# EAGLE board xerc2-1- (EAGLE 7.5.0)
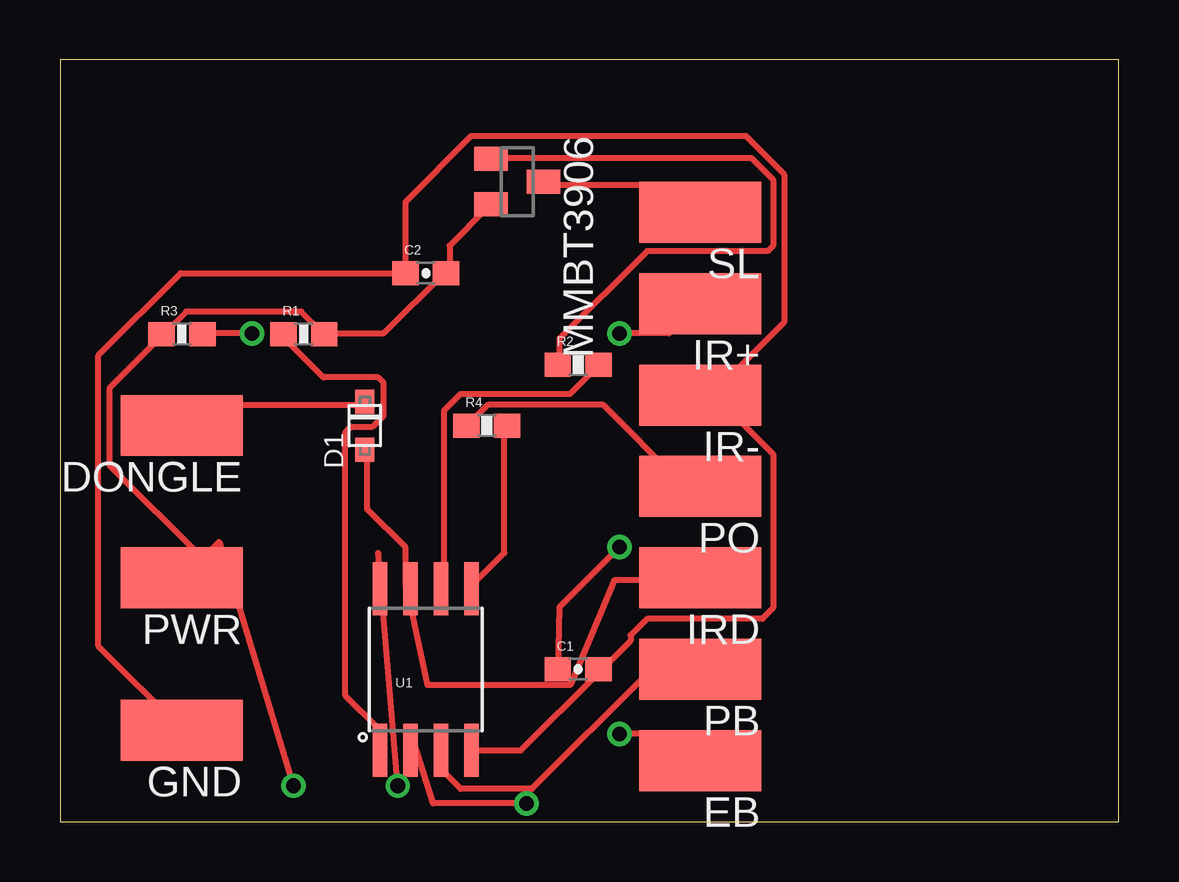
[diagram p0: board, top side]
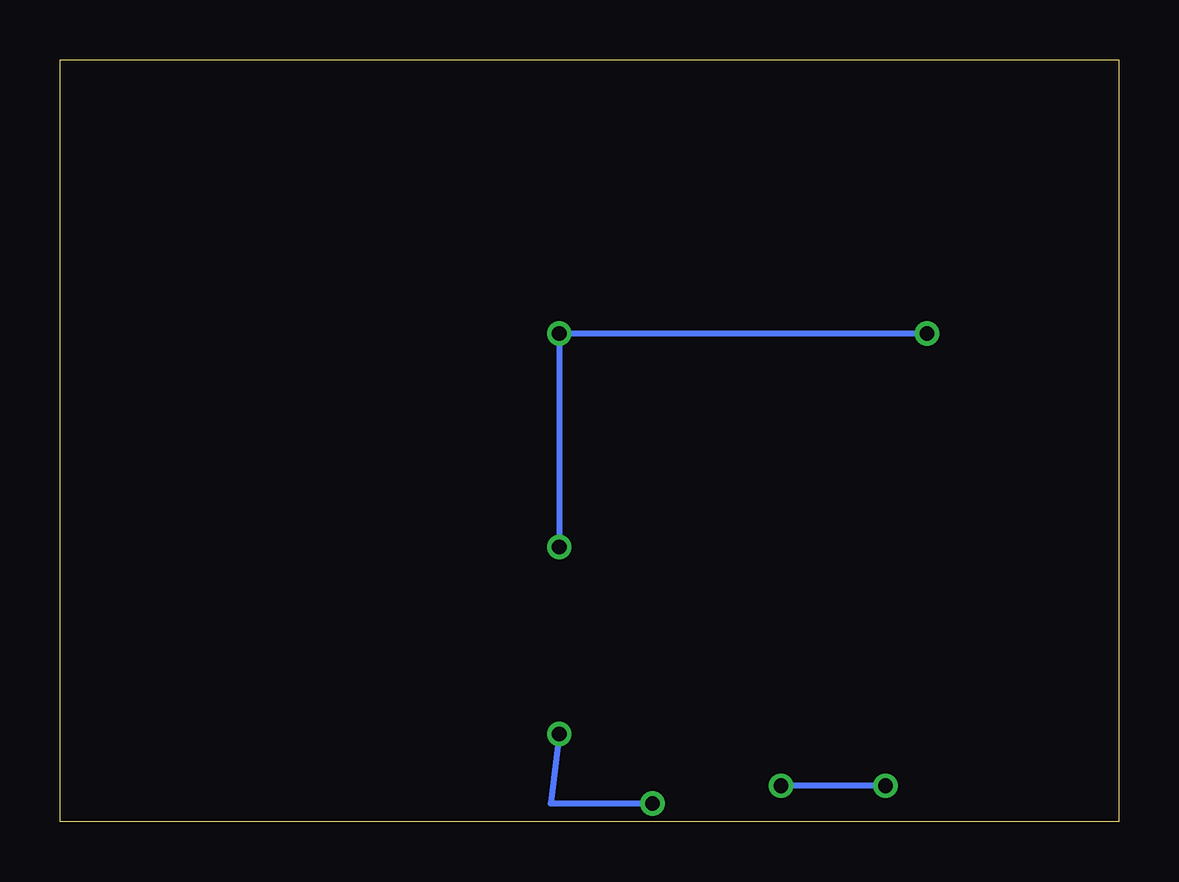
[diagram p1: board, bottom side, seen from below]

Size 44.12 x 31.74 mm. Coordinates in mm from the lower left corner, seen from the top.
Outline: 0,0 44.12,0 44.12,31.74 0,31.74 0,0
Copper layers (1*16): Top 0.035mm / dielectric 1.5mm / Bottom 0.035mm
Design rules "default": minimum track width 10mil, minimum drill 24mil, track to track 8mil, track to pad 8mil, pad to pad 8mil, via to via 8mil, smd to smd 8mil, copper to edge 40mil, drill to drill 8mil, minimum pad ring 10mil, minimum via ring 8mil, stop-mask expansion 4mil, vias tented up to drill 0mil, thermal gap 10mil

## Footprints (pad centres in the part's own frame; a part is rotated, then mirrored left to right if it is on the bottom)
0603-CAP = smd 1.1 x 1: 1 -0.85,0; 2 0.85,0
SOD-323F = smd 1 x 0.8: A -1,0; C 1,0
SMD2,54-5,08 = smd 2.54 x 5.08: 1 0,0
SOT23 = smd 1 x 1.4: 1 -0.95,-1.1; 2 0.95,-1.1; 3 0,1.1
0603-RES = smd 1.1 x 1: 1 -0.85,0; 2 0.85,0
SO08-EIAJ = smd 0.61 x 2.21: 1 -1.905,-3.378; 2 -0.635,-3.378; 3 0.635,-3.378; 4 1.905,-3.378; 5 1.905,3.353; 6 0.635,3.353; 7 -0.635,3.353; 8 -1.905,3.353

## Placement (x,y rotation side)
C1  4.7uf  [0603-CAP]  21.59,6.35 0 top
C2  0.1uF  [0603-CAP]  15.24,22.86 0 top
D1  [SOD-323F]  12.7,16.51 90 top
DONGLE  [SMD2,54-5,08]  5.08,16.51 90 top
EB  [SMD2,54-5,08]  26.67,2.54 90 top
GND  [SMD2,54-5,08]  5.08,3.81 90 top
IR+  [SMD2,54-5,08]  26.67,21.59 90 top
IR-  [SMD2,54-5,08]  26.67,17.78 90 top
IRD  [SMD2,54-5,08]  26.67,10.16 90 top
MMBT3906  Q1  [SOT23]  19.05,26.67 270 top
PB  [SMD2,54-5,08]  26.67,6.35 90 top
PO  [SMD2,54-5,08]  26.67,13.97 90 top
PWR  [SMD2,54-5,08]  5.08,10.16 90 top
R1  10k  [0603-RES]  10.16,20.32 0 top
R2  10k  [0603-RES]  21.59,19.05 0 top
R3  100  [0603-RES]  5.08,20.32 0 top
R4  10k  [0603-RES]  17.78,16.51 0 top
SL  [SMD2,54-5,08]  26.67,25.4 90 top
U1  Tiny85-20-SMT  [SO08-EIAJ]  15.24,6.35 0 top

## Library data of the parts
C1 = SparkFun-Capacitors
C2 = SparkFun-Capacitors; PROD_ID: CAP-00810
D1 = adafruit
DONGLE EB GND IR+ IR- IRD PB PO PWR SL = wirepad
MMBT3906 = transistor-pnp
R1 R3 = SparkFun-Resistors
R2 R4 = SparkFun-Passives
U1 = SparkFun-DigitalIC; PROD_ID: IC-09092

## Nets
GND: C1.2 C2.1 GND.1 IR-.1 U1.4
N$1: PB.1 U1.3
N$2: R1.1 U1.1
N$3: EB.1 U1.2
N$4: D1.A IRD.1 U1.7
N$5: R2.2 U1.6
N$6: MMBT3906.1 R2.1
N$7: MMBT3906.3 SL.1
N$8: C1.1 IR+.1 R3.2
N$9: R4.2 U1.5
N$10: PO.1 R4.1
N$11: D1.C DONGLE.1
VCC: C2.2 MMBT3906.2 PWR.1 R1.2 R3.1 U1.8

## Tracks (layer width: path | path; a pad name or v marks a point on that pad's centre or on a via)
GND
  Top 0.254: U1.4 19.2,2.97 22.4,6.17 C1.2 22.63,6.4 23.77,7.54 23.77,7.77 24.46,8.46 29.26,8.46 29.72,8.91 29.72,15.32 27.43,17.6 | 27.43,17.6 26.75,17.6 IR-.1 27.43,17.6 | GND.1 5.03,3.89 1.6,7.32 1.6,19.43 5.03,22.86 C2.1 14.4,22.86 14.4,25.83 17.14,28.57 28.57,28.57 30.18,26.98 30.18,20.8 27.43,18.06 27.43,17.6
N$1
  Top 0.254: U1.3 16,2.97 16,2.06 16.69,1.37 19.66,1.37 24.46,6.17 26.52,6.17 PB.1
N$2
  Top 0.254: R1.1 9.37,20.12 10.97,18.52 13.26,18.52 13.49,18.29 13.49,16.92 13.03,16.46 12.12,16.46 11.89,16.23 11.89,5.26 13.26,3.89 13.26,2.97 U1.1
N$3  (via drill 0.61)
  Top 0.254: v19.43,0.76 15.54,0.76 14.63,3.66 14.63,2.97 U1.2 | v23.32,3.66 25.6,3.66 26.52,2.74 EB.1
  Bottom 0.254: v19.43,0.76 23.67,0.76 v23.32,3.66
N$4
  Top 0.254: D1.A 12.8,15.32 12.8,13.03 14.4,11.43 14.4,9.83 U1.7 14.63,9.6 14.63,8.91 15.32,5.69 21.26,5.69 23.09,10.06 26.52,10.06 IRD.1
N$5
  Top 0.254: R2.2 22.4,18.97 21.26,17.83 16.69,17.83 16,17.14 16,9.83 U1.6
N$6
  Top 0.254: R2.1 20.8,19.2 20.8,20.12 24.46,23.77 29.49,23.77 29.72,24 29.72,26.75 28.8,27.66 18.06,27.66 MMBT3906.1
N$7
  Top 0.254: MMBT3906.3 20.34,26.52 25.6,26.52 26.52,25.6 SL.1
N$8  (via drill 0.61)
  Top 0.254: v23.32,11.46 20.8,8.94 C1.1 | v23.32,20.34 25.38,20.34 26.52,21.49 IR+.1 | v8,20.34 5.94,20.34 R3.2
  Bottom 0.254: v23.32,11.46 v23.32,20.34 v8,20.34
N$9
  Top 0.254: R4.2 18.52,16.46 18.52,11.2 17.14,9.83 U1.5
N$10
  Top 0.254: R4.1 17.14,16.69 17.83,17.37 22.63,17.37 25.83,14.17 26.52,14.17 PO.1
N$11
  Top 0.254: DONGLE.1 5.94,17.37 12.57,17.37 D1.C
VCC  (via drill 0.61)
  Top 0.254: v14.07,1.5 13.26,11.2 13.26,9.83 U1.8 | v9.73,1.5 6.63,11.66 5.94,10.97 | 5.94,10.97 5.26,10.29 PWR.1 5.94,10.97 | MMBT3906.2 17.83,25.6 16.23,24 16.23,22.86 C2.2 16,22.86 13.49,20.34 11.2,20.34 R1.2 10.97,20.34 10.06,21.26 5.26,21.26 4.34,20.34 R3.1 4.12,20.12 2.06,18.06 2.06,14.86 5.94,10.97
  Bottom 0.254: v9.73,1.5 v14.07,1.5